# Allegro board MC1_1.brd
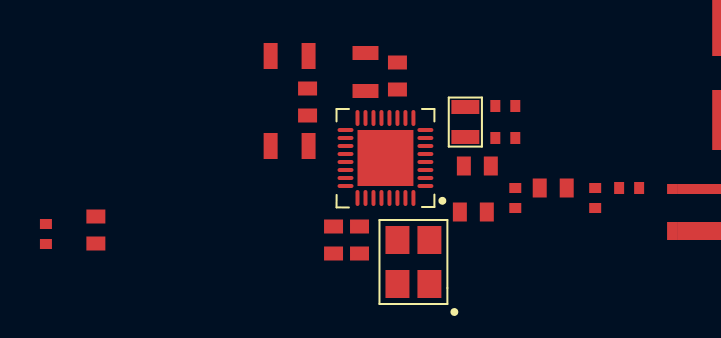
[diagram p0: board, top side]
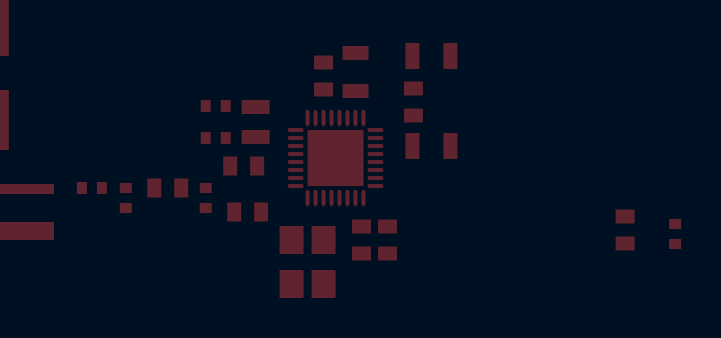
[diagram p1: board, bottom side, seen from below]

No outline. copper layers: TOP, BOTTOM. Coordinates in mm from the lowest, leftmost part position.

## Design rules (mm)
constraint set DEFAULT: min track width 0.127

## Placement (name value [footprint] x y rotation side)
A1  TI AN043  [AN043_PATCH_ANTENNA]  31.6 0.6 270 top
C1  12p  [0402_C]  23 6.2 0 top
C2  12p  [0402_C]  23 7.8 0 top
C3  1uF  [0805_C]  16 9.5 270 top
C4  100nF  [0603_C]  17.6 9.3 90 top
C5  100nF  [0603_C]  14.4 1.1 270 top
C6  10uF  [0805_C]  12.2 5.8 180 top
C7  10uF  [0805_C]  12.2 10.3 180 top
C8  100nF  [0603_C]  2.5 1.6 90 top
C9  100nF  [0603_C]  21.4 2.5 0 top
C10  100nF  [0603_C]  15.7 1.1 270 top
C11  12pF  [0402_C]  29.2 3.7 0 top
C12  1.2pF  [0402_C]  23.5 3.2 270 top
C13  1.2pF  [0402_C]  27.5 3.2 270 top
CYS1  24MHz  [TSX-3225_XTAL]  18.4 0 90 top
CYS2  32.768MHz  [SC-20S_XTAL]  21 7 90 top
L1  10uH  [0603_L]  13.1 8 90 top
L2  FerriteBead  [0402_L]  0 1.4 270 top
L3  15nH  [0603_L]  21.6 4.8 0 top
L4  2nH  [0603_L]  25.4 3.7 0 top
M1  TI CC2640R2F RSM  [CC2640R2FRSM]  17 5.2 90 top

## Library data of the parts
A1 = ANTENNA
C1-C13 = CAP
CYS1 = CRYSTAL_24M
CYS2 = CRYSTAL_32768
L1 L3 L4 = IND
L2 = FerriteBead
M1 = CC2640

## Footprints (pads in the part's own frame, mm; a bottom-side part is the same pattern mirrored in y, then rotated)
0402_C
  rect 0.5x0.6 smd: 1(-0.5,0) 2(0.5,0)
0402_L
  rect 0.5x0.6 smd: 1(-0.5,0) 2(0.5,0)
0603_C
  rect 0.7x0.95 smd: 1(-0.675,0) 2(0.675,0)
0603_L
  rect 0.7x0.95 smd: 1(-0.675,0) 2(0.675,0)
0805_C
  rect 0.7x1.3 smd: 1(-0.95,0) 2(0.95,0)
AN043_PATCH_ANTENNA
  rect 0.9x0.5 smd: 1(-0.95,-0.25)
  rect 0.5x0.5 smd: 2(-3.05,-0.25)
CC2640R2FRSM
  rrect 0.2x0.8 smd: 1(-1.4,-2) 2(-1,-2) 3(-0.6,-2) 4(-0.2,-2) 5(0.2,-2) 6(0.6,-2) 7(1,-2) 8(1.4,-2) 24(-1.4,2)
  rrect 0.8x0.2 smd: 9(2,-1.4) 10(2,-1) 11(2,-0.6) 12(2,-0.2) 13(2,0.2) 14(2,0.6) 15(2,1) 16(2,1.4) 25(-2,1.4) 26(-2,1) 27(-2,0.6) 28(-2,0.2) 29(-2,-0.2) 30(-2,-0.6) 31(-2,-1) 32(-2,-1.4)
  rrect 0.2x0.8 smd rot 0.2: 17(1.4,2) 18(1,2) 19(0.6,2) 20(0.2,2) 21(-0.2,2) 22(-0.6,2) 23(-1,2)
  rect 2.8x2.8 smd: 33(0,0)
SC-20S_XTAL
  rect 0.7x1.4 smd: 1(-0.75,0) 2(0.75,0)
TSX-3225_XTAL
  rect 1.4x1.2 smd: 1(-1.1,-0.8) 2(1.1,-0.8) 3(1.1,0.8) 4(-1.1,0.8)

## Nets
GND: A1.1(-) C1.2(B) C2.2(B) C3.1 C4.2(B) C5.2(B) C6.2(B) C7.2(B) C8.2(B) C9.2(B) C10.2(B) C12.2(B) C13.2(B) CYS1.2 CYS1.4 M1.3 M1.7 M1.17 M1.20 M1.29 M1.33
VCC: L2.1
VDDR: C7.1 C9.1 C10.1 L1.2(B) M1.28 M1.32
VDDS: C4.1 C5.1 C6.1 C8.1 L2.2(B) M1.11 M1.19 M1.27
ALRTN: M1.24
ANTENNA: A1.2 C11.2(B)
BUZ: M1.10
DCDC_SW: L1.1 M1.18
DCOUPL: C3.2(B) M1.12
FILTER: C11.1 C13.1 L4.2(B)
LED: M1.8
RESET: M1.21
RF_N: L3.1 M1.2
RF_P: C12.1 L3.2(B) L4.1 M1.1
SCL: M1.26
SDA: M1.25
SENSOR_MTR: M1.22
SENSOR_ON: M1.9
TCKC: M1.14
TDI: M1.16
TDO: M1.15
TMSC: M1.13
X24M_N: CYS1.3 M1.30
X24M_P: CYS1.1 M1.31
X32K_Q1: C1.1 CYS2.1 M1.5
X32K_Q2: C2.1 CYS2.2(B) M1.6(X32K_Q2)

Pads without a net: M1 4 23

## Copper pours and planes (outline as drawn; the poured copper is in the pictures)
Net_1 on TOP (solid shape): 36.5,12.8 33.86,12.8 33.86,10.8 36.5,10.8 36.5,8.1 33.86,8.1 33.86,6.1 36.5,6.1 36.5,1.1 31.6,1.1 31.6,2 36,2 36,3.4 31.6,3.4 31.6,3.9 36,3.9 36,5.6 33.36,5.6 33.36,8.6 36,8.6 36,10.3 33.36,10.3 33.36,13.3 36,13.3 36,15 32.06,15 32.06,15.5 36.5,15.5
